# Altium PCB Mainboard.PcbDoc
Units mil, origin at the board's own origin, x right, y up, seen from the top; angles counter-clockwise.
Board outline 2233 x 1279 mil, 4 copper layers (Top Layer, GND, Power, Bottom Layer), stack 23.756 mil thick; 18 components, 15 nets, 70 pads, 11 vias.
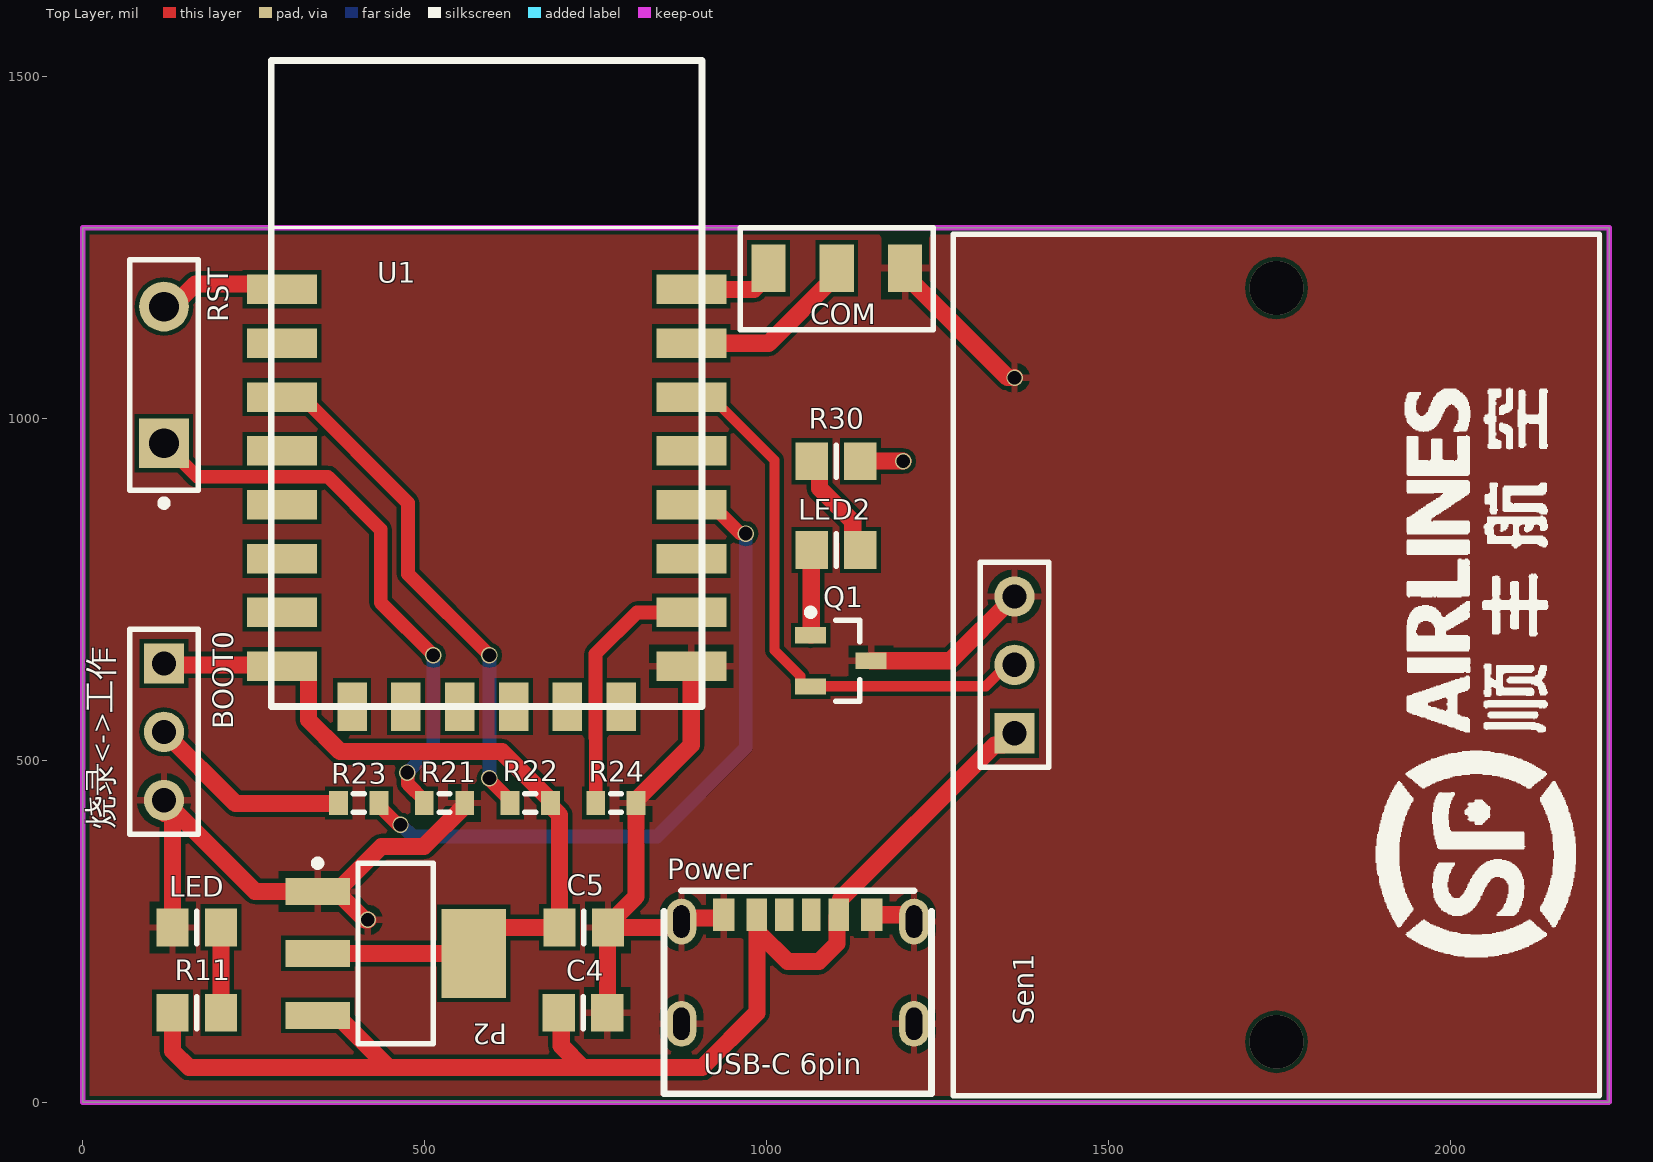
[diagram p0: Top Layer view]
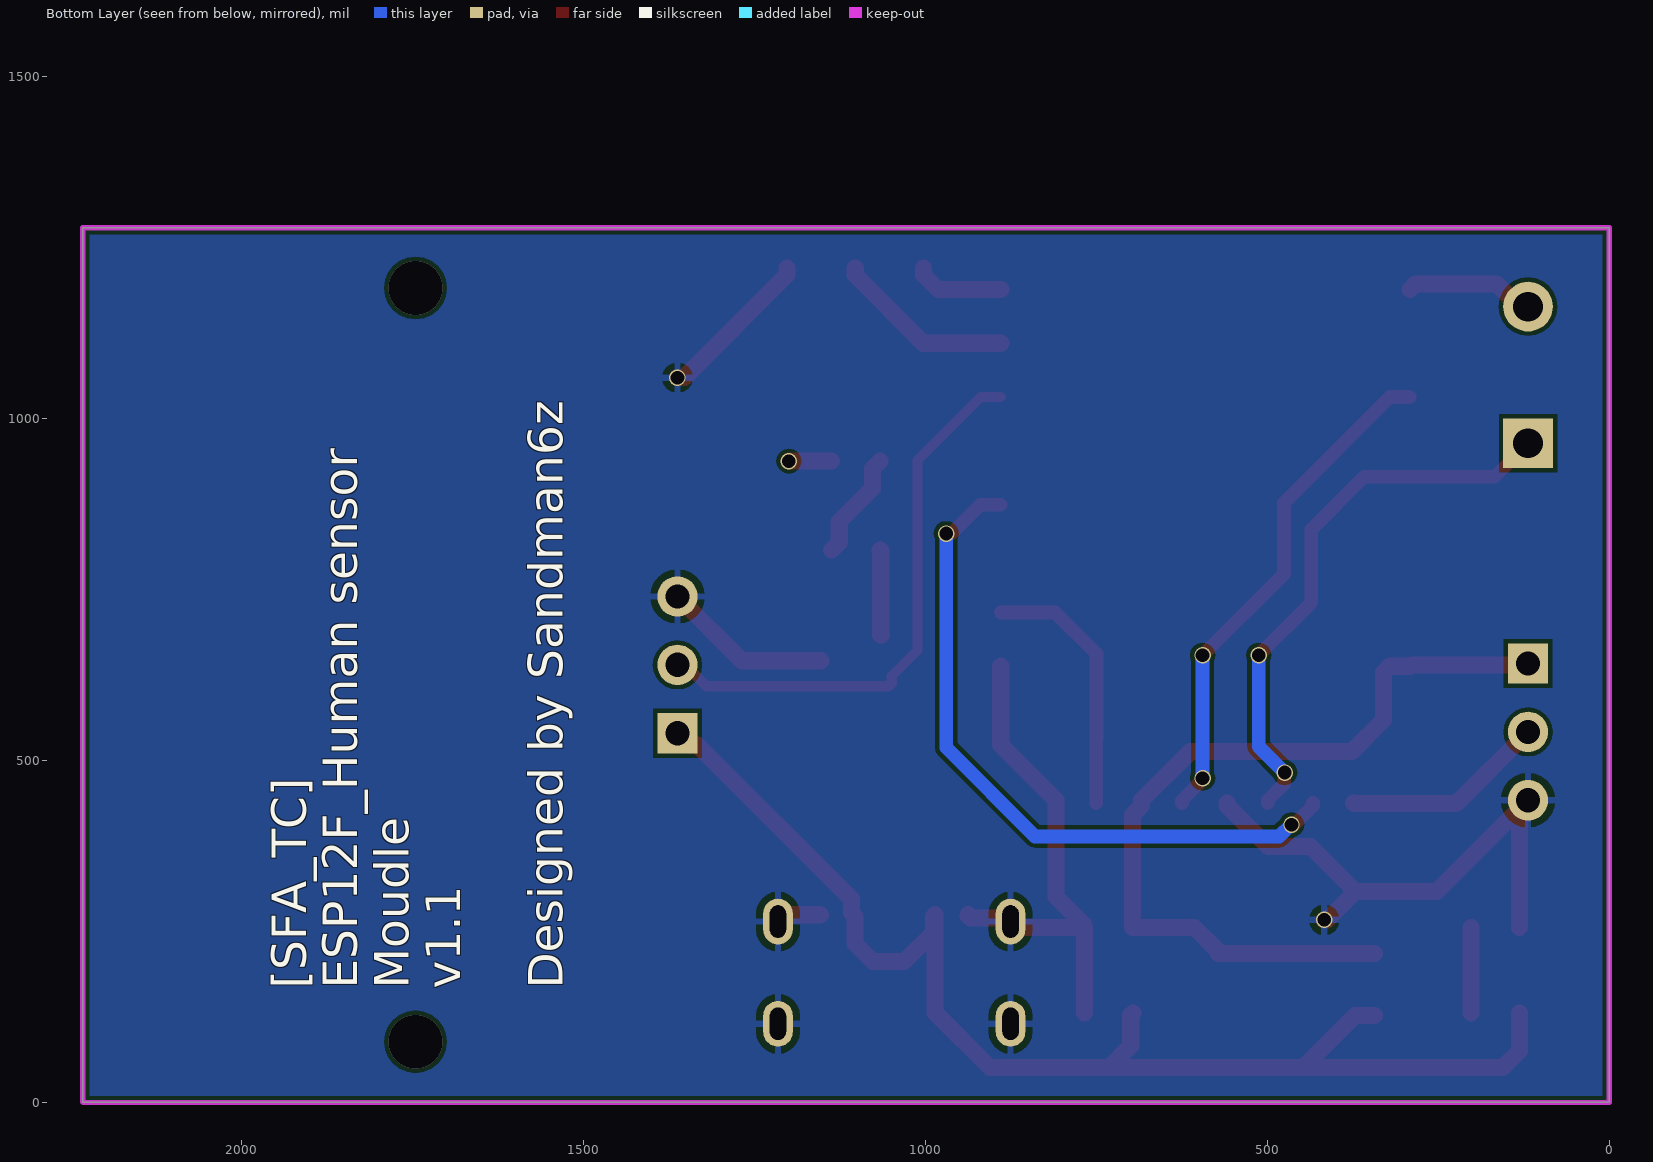
[diagram p1: Bottom Layer view, seen from below]
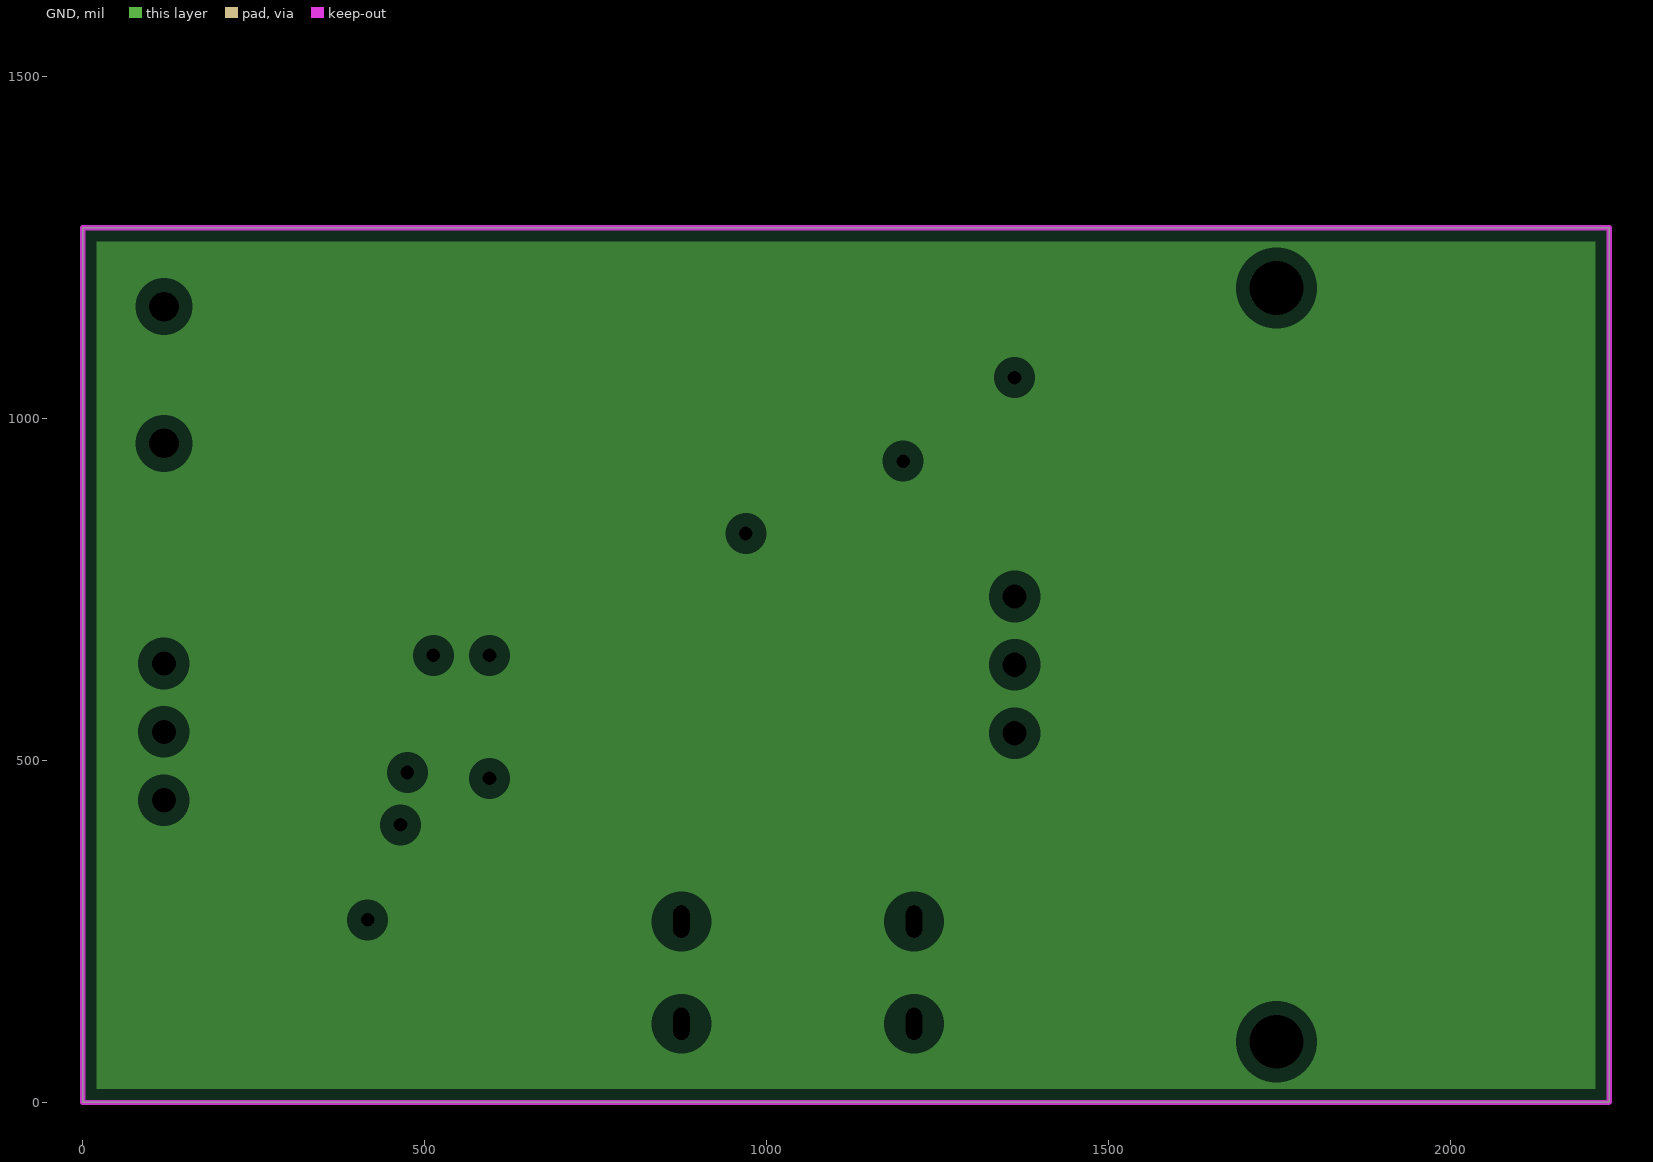
[diagram p2: GND, clearances drawn from the general rule]
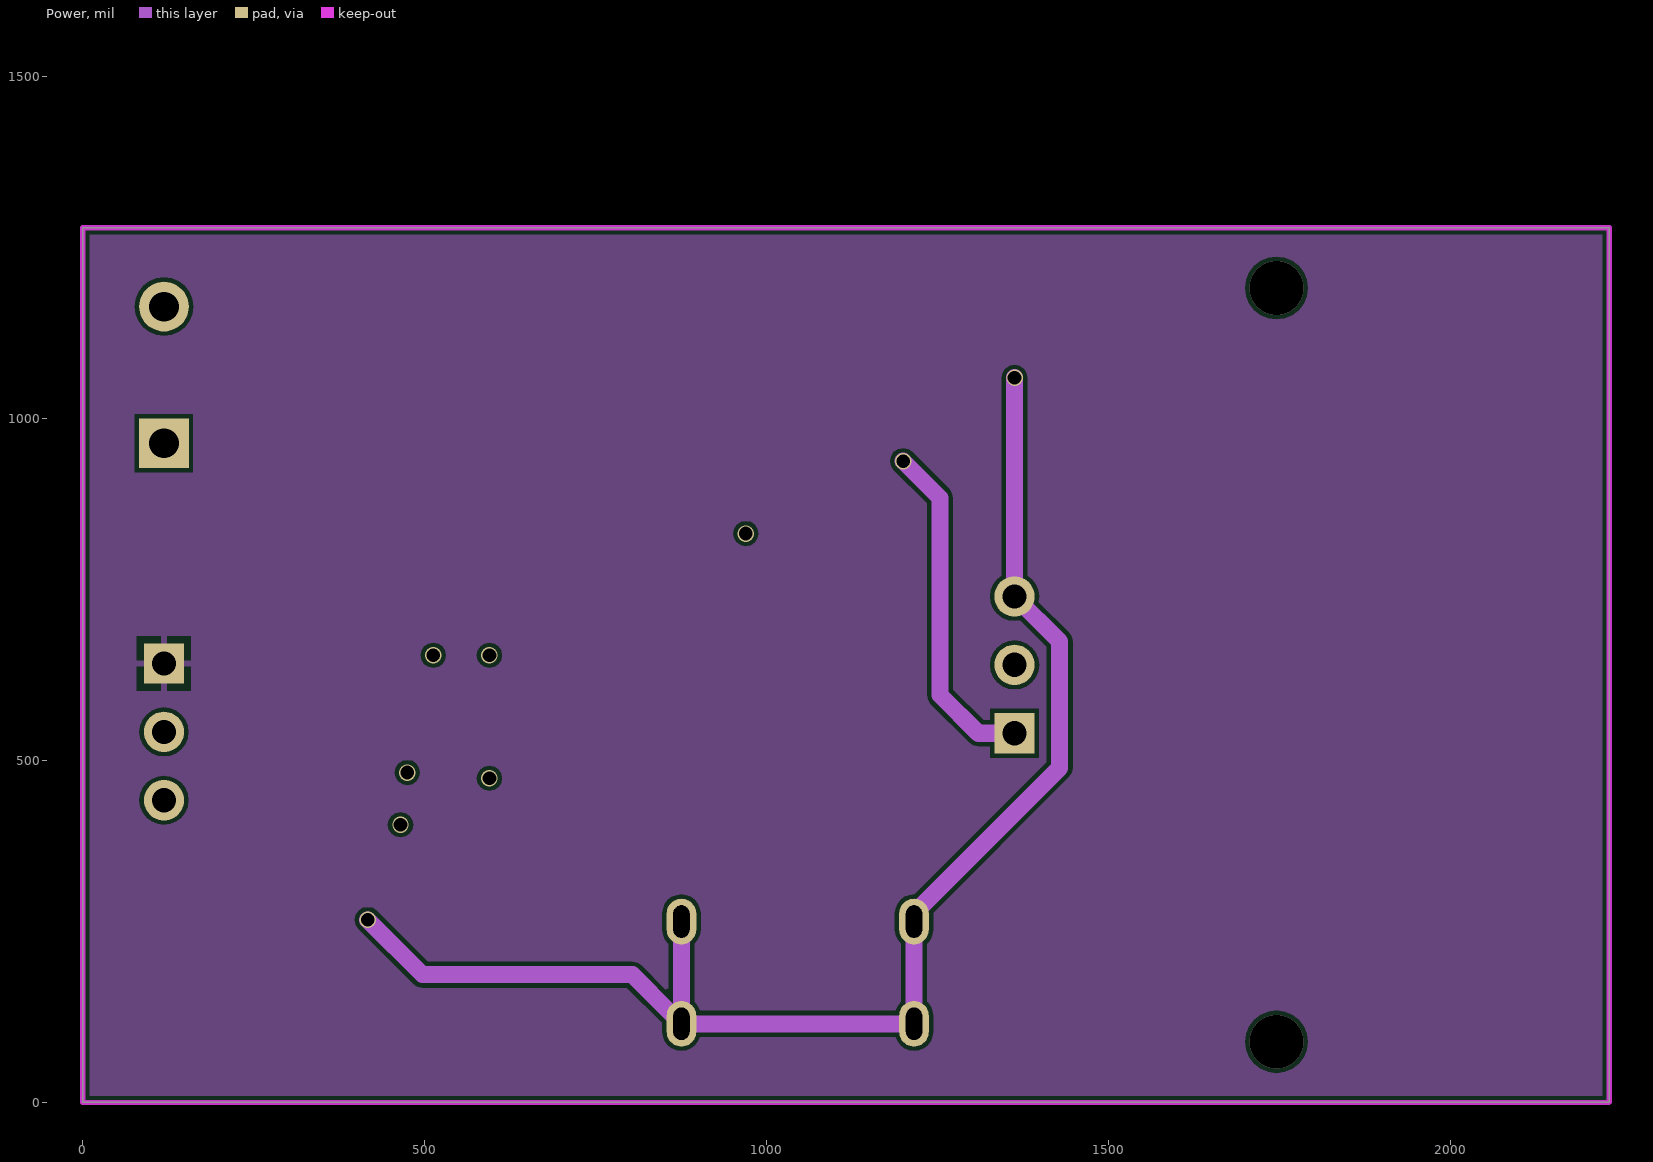
[diagram p3: Power]

## Layer stack, top to bottom
Top Solder: solder mask 0.4, Solder Resist, Dk 3.5
Top Layer: signal copper 1.4
Dielectric 1: prepreg 2.8, PP-006, Dk 4.1
GND: plane copper 1.378
Dielectric 2: dielectric 12.6, FR-4, Dk 4.8
Power: signal copper 1.378
Dielectric 3: prepreg 2.8, PP-006, Dk 4.1
Bottom Layer: signal copper 1.4
Bottom Solder: solder mask 0.4, Solder Resist, Dk 3.5

## Board outline
0,0 0,1279 2233,1279 2233,0

## Design rules (kind name [scope] priority, off if disabled: settings)
Clearance [All] p1: gap=6 ignorepadtopadclearanceinfootprint=FALSE
HoleToHoleClearance [All] p1: gap=6 allowstackedmicrovias=TRUE
MinimumSolderMaskSliver [All] p1: minsoldermaskwidth=3
PlaneClearance [All] p1: clearance=20
PlaneConnect [All] p1: planeconnectstyle=Relief reliefexpansion=20 reliefentries=4 reliefconductorwidth=10 reliefairgap=10
PolygonConnect [All] p1: connectstyle=Relief reliefconductorwidth=10 reliefentries=4 polygonreliefangle="90 Angle" airgapwidth=10
RoutingVias [All] p1: holewidth=16 width=24 viastyle="Through Hole" minholewidth=10 minwidth=20 maxholewidth=24 maxwidth=32
SilkToSilkClearance [All] p1: silktosilkclearance=0
SilkToSolderMaskClearance [IsPad] p1: minsilkscreentomaskgap=0 clearancetoexposedcopper=TRUE
SolderMaskExpansion [All] p1: expansion=4 istentingtop=FALSE
Width Width_GND [InNet('GND') And OnLayer('Top Layer')] p1: maxlimit=40 minlimit=10 preferedwidth=25 minimp=50.000000 maximp=50.000000 favimp=50.000000
Width Width_Power [InNet('3V3') And OnLayer('Top Layer')] p2: maxlimit=40 minlimit=10 preferedwidth=25 minimp=50.000000 maximp=50.000000 favimp=50.000000
Width [All] p3: maxlimit=25 minlimit=10 preferedwidth=20 minimp=50.000000 maximp=50.000000 favimp=50.000000
24 further rules are at their usual default settings.

## Classes and differential pairs
component class Power: 5->3V3 C4 C5 LED P2 Power R11
component class ESP12F: BOOT0 COM LED2 Q1 R21 R22 R23 R24 R30 RST Sen1 U1

## Components (designator, comment, footprint, x,y, rotation, side; value= is the part's Value field where it differs from the comment)
BOOT0 "模式选择" HDR1X3 119,642 r270 top
C4 "Cap" 6-0805_N 732,131 r180 top value=100pF
C5 "Cap" 6-0805_N 733,256 r180 top value=100pF
COM "UART_3pads" 3pads 1003,1220 r90 top
LED "LED3" 6-0805_N 167,256 r180 top
LED2 "LED3" 6-0805_N 1102,808 r180 top
P2 "LMS8117AMP-3.3" MP04A_N 458,218 r0 top
Power "USB-C" USB-C 875.84,264.61 r0 top
Q1 "QNPN" SOT-23B_N 1109,646 r0 top
R11 "Res3" 6-0805_N 167,131 r180 top value=1K
R21 "Res3" J1-0603 529.33,438 r180 top value=1K
R22 "Res3" J1-0603 654.67,438 r180 top value=1K
R23 "Res3" J1-0603 404,438 r180 top value=1K
R24 "Res3" J1-0603 780,438 r0 top value=1K
R30 "Res3" 6-0805_N 1102,938 r0 top value=1K
RST "SW-PB" SPST-2 119,1064 r90 top
Sen1 "HR-SR501" HR-SR501 2218.51,10.08 r90 top locked
U1 "ESP-12E&F Onboard Module" "ESP-12E&F Module" 591,884 r0 top locked

## Footprints (in the part's own frame and the unit in brackets; to place one, negate y for a bottom-side part, rotate by r counter-clockwise, add the part's x,y. Pads: shape width x height; smd on the part's side, far side on the other; paste and mask are expansions set on the pad)
3pads [mil]
  rect 70x50 smd: 1(0,0) 2(0,-100) 3(0,-200)
6-0805_N [mm] "Chip Resistor, Body 2.0x1.2mm, IPC Medium Density"
  rect 1.2x1.4 smd: 1(-0.9,0) 2(0.9,0)
  silkscreen extent 0,-0.6 0,0.6, body extent -1.07,-0.7 1.07,0.7, height 0.7
"ESP-12E&F Module" [mm]
  rect 2.6x1.1 smd: 1(-7.6,7.75) 2(-7.6,5.75) 3(-7.6,3.75) 4(-7.6,1.75) 5(-7.6,-0.25) 6(-7.6,-2.25) 7(-7.6,-4.25) 8(-7.6,-6.25) 15(7.6,-6.25) 16(7.6,-4.25) 17(7.6,-2.25) 18(7.6,-0.25) 19(7.6,1.75) 20(7.6,3.75) 21(7.6,5.75) 22(7.6,7.75)
  rect 1.1x1.8 smd: 9(-5,-7.75) 10(-3,-7.75) 11(-1,-7.75) 12(1,-7.75) 13(3,-7.75) 14(5,-7.75)
  silkscreen extent -8,-7.75 8,16.25, body extent -8.01,-7.75 8,16.26, height 2.65
HDR1X3 [mm] "Connector; Header; 3 Position"
  rect 1.5x1.5 hole 0.9: 1(0,0)
  round 1.5 hole 0.9: 2(2.54,0) 3(5.08,0)
  silkscreen extent -1.27,-1.27 6.35,1.27
HR-SR501 [mm] "人体红外感应模块"
  rect 1.5x1.5 hole 0.9: 1(13.46,21.73)
  round 1.5 hole 0.9: 2(16,21.73) 3(18.54,21.73)
  silkscreen extent 0,0 32,24, body extent 0,0 32,24, height 16.6
J1-0603 [mm] "Chip Resistor, Body 1.6x0.8mm, IPC High Density"
  rect 0.7x0.9 smd: 1(-0.75,0) 2(0.75,0)
  silkscreen extent -0.2,-0.35 0.2,0.35, body extent -0.85,-0.48 0.85,0.48, height 0.9
MP04A_N [mm] "SOT223, 4-Leads, Body 6.5x3.5mm, Pitch 2.3mm, Lead Span 7mm, IPC Medium Density"
  rect 2.4x1 smd: 1(-2.9,2.3) 2(-2.9,0) 3(-2.9,-2.3)
  rect 2.4x3.3 smd: 4(2.9,0)
  silkscreen extent -3.02,-3.35 1.4,3.47, body extent -1.86,-3.35 1.86,3.35, height 1.8
SOT-23B_N [mm] "SOT23, 3-Leads, Body 2.9x1.3mm, Pitch 0.95mm, Lead Span 2.4mm, IPC Medium Density"
  rect 1.15x0.6 smd: 1(-1.125,0.95) 2(-1.125,-0.95) 3(1.125,0)
  silkscreen extent -1.25,-1.5 0.7,1.92, body extent -0.7,-1.5 0.7,1.5, height 1.14
SPST-2 [mm] "Switch; 2 Leads"
  rect 1.85x1.85 hole 1.1: 1(-2.54,0)
  round 1.85 hole 1.1: 2(2.54,0)
  silkscreen extent -4.89,-1.27 4.28,1.27
USB-C [mm]
  rect 0.8x1.2 smd: 1(1.57,0.254) 6(7.07,0.254)
  rect 0.76x1.2 smd: 2(2.8,0.254) 5(5.84,0.254)
  rect 0.7x1.2 smd: 3(3.82,0.254) 4(4.82,0.254)
  oval 1.1x1.7 hole 1.2 slot 0.6 at 0 deg: 7(0,0) 8(0,-3.8) 9(8.64,0) 10(8.64,-3.8)
  silkscreen extent -0.65,-6.4 9.29,1.14, body extent -0.13,-6.62 8.81,1.28, height 3.19

## Part data
BOOT0: library part "Header 3", "Header, 3-Pin", LatestRevisionDate=17-Jul-2002, LatestRevisionNote="Re-released for DXP Platform.", Publisher="Altium Limited"
C4 C5: "Capacitor", LatestRevisionDate=17-Jul-2002, LatestRevisionNote="Re-released for DXP Platform.", PackageDescription="Radial Cap, Thru-Hole; 2 Leads; 0.3 in Pin Spacing", PackageReference=RAD-0.3, Published=8-Jun-2000, Publisher="Altium Limited"
LED LED2: "Typical BLUE SiC LED", DatasheetVersion=16-Apr-2002, LatestRevisionDate=17-Dec-2003, LatestRevisionNote="PCB Footprint replaced.", PackageDescription="SM LED; 2 C-Bend Leads; Body 3.5 x 2.8 x 1.9 mm, inc leads (LxWxH typ)", PackageReference=3.5X2.8X1.9, PackageVersion=16-Apr-2002, Published=8-Jun-2000, Publisher="Altium Limited"
P2: "1A Low-Dropout Linear Regulator, 4-pin SOT-223", Manufacturer="National Semiconductor", PackageTopMarking=XYTT*LS01, PowerWise=N, Code_IPC=SOT223-4, Code_JEDEC=TO-261-AA, ComponentLink1Description="Manufacturer URL", ComponentLink1URL=http://www.national.com/, ComponentLink2Description="LMS8117A Datasheet", ComponentLink2URL=http://www.national.com/ds/LM/LMS8117A.pdf, ComponentLink3Description="LMS8117A Web Page", ComponentLink3URL=http://www.national.com/pf/LM/LMS8117A.html, ComponentLink4Description="MP04A Package Page", ComponentLink4URL=http://www.national.com/packaging/folders/mp04a.html, CompType="LDO IC", DatasheetVersion=Apr-2005, High-Reliability=Y, PackageDescription="Molded SOT-223, 6.50 x 3.56 x 1.6mm Body, 4 Lead, 2.3mm Pitch", PackageReference=MP04A, PackageVersion="revB, Apr-2003", PartNumber=LMS8117AMP-3.3, PinCount=4, RoHS=N
Q1: "NPN Bipolar Transistor", LatestRevisionDate=29-May-2009, LatestRevisionNote="IPC-7351 Footprint Added.", PackageDescription="3-Pin SOT-23 Package 0.95 mm Pitch, 2.4 mm Lead Span", PackageReference=SOT-23B, PackageVersion=Aug-1999, Published=8-Jun-2000, Publisher="Altium Limited"
R11 R21 R22 R23 R24 R30: "Resistor", LatestRevisionDate=29-May-2009, LatestRevisionNote="IPC-7351 Footprint Added.", PackageDescription="Chip Resistor", PackageReference=J1-0603, Published=8-Jun-2000, Publisher="Altium Limited"
RST: "Switch", LatestRevisionDate=17-Jul-2002, LatestRevisionNote="Re-released for DXP Platform.", PackageDescription="Switch; 2 Leads", PackageReference=SPST-2, Published=24-Mar-1999, Publisher="Altium Limited"
Sen1: "人体红外感应模块"

## Via types
v1: diameter 24, hole 20, Top Layer to Bottom Layer, 9 vias
v2: diameter 78.74, hole 78.74, Top Layer to Bottom Layer, 2 vias

## Nets (pads, with @x,y where several pads share a name; then routed paths per layer and width w, separated by ;. In a path a pad name is that pad's centre, name@x,y a point inside that pad or via, vN(x,y) a via of type N, cw(c..) or ccw(c..) an arc to the next point about the centre after c; other vN are vias at no path point)
3V3: BOOT0.1 C5.2 P2.2 P2.4 R22.1 U1.8 | length 1251.6
  Top Layer w25: BOOT0.1 121.03,639.97 289.76,639.97 U1.8 321.32,637.94 330.47,628.78 330.47,559.31 376.78,513 613.13,513 684.19,441.94 R22.1 684.19,434.06 697.57,420.69 C5.2 606.92,256 572.17,221.26 P2.4 P2.2
GND: BOOT0.3 C4.1 C5.1 COM.3 LED.2 P2.1 Power.1 Power.6 Power.7 Power.8 Power.9 Power.10 Q1.3 R21.1 R24.2 Sen1.3 U1.15 | length 4169.3
  Top Layer w20: BOOT0.3 119,420.22 BOOT0.3@131.57,420.22
  Top Layer w25: BOOT0.3 252.45,308.55 P2.1 P2.1@371.39,308.55 ; LED.2 BOOT0.3@131.57,420.22 ; v1(417,267) 412.94,267 P2.1@371.39,308.55 ; R21.1 558.86,434.06 499.06,374.26 437.09,374.26 P2.1@371.39,308.55 ; C4.1 767.93,131.5 767.93,255.5 C5.1 ; U1.15 890.21,522.62 809.53,441.94 R24.2 809.53,301.03 768.43,259.94 C5.1 ; Power.1 937.65,272.85 934.41,269.61 880.84,269.61 Power.7 875.84,264.46 867.39,256 C5.1 ; Q1.3 1269,646 Sen1.3 ; Power.6 1207.54,274.61 1216,266.15 Power.9 ; COM.3 1203,1210 1353,1060 v1(1363,1060)
  Power w25: v1(417,267) 497,187 803.84,187 860.53,130.31 867.39,130.31 Power.8@875.84,121.86 ; Power.7 Power.8@875.84,121.86 ; v1(1363,1060) Sen1.3 1429,674 1429,489.42 Power.9@1218.58,279 ; Power.8@875.84,121.86 Power.8 Power.10 Power.9 Power.9@1216,279 ; Power.9@1216,279 Power.9@1218.58,279 ; Power.9@1216,279 Power.9@1218.58,279
GPIO0: BOOT0.2 R23.2 | length 299.4
  Top Layer w25: BOOT0.2 224,437 373.47,437 R23.2
NetLED2_1: LED2.1 R30.1 | length 159.4
  Top Layer w25: R30.1 1077.69,926.88 1077.69,898.31 1126.31,849.69 1126.31,819.12 LED2.1
NetLED2_2: LED2.2 Q1.1 | length 125.5
  Top Layer w25: Q1.1 1064.95,683.4 1065.64,684.09 1065.64,807.07 LED2.2
NetLED_1: LED.1 R11.1 | length 125
  Top Layer w25: R11.1 LED.1
NetR21_2: R21.2 RST.1 | length 828
  Top Layer w20: RST.1 167.76,915.24 358.76,915.24 435.88,838.12 435.88,731.12 v1(513,654) ; v1(475,482.5) 474.23,481.73 474.68,481.73 475.77,480.65 475.77,465.98 499.81,441.94 R21.2
  Bottom Layer w20: v1(475,482.5) 513,520.5 v1(513,654)
NetR22_2: R22.2 U1.3 | length 749
  Top Layer w20: U1.3 321.31,1031.64 476,876.95 476,773 v1(595,654) ; v1(595,474.08) 595,472.08 625.14,441.94 R22.2
  Bottom Layer w20: v1(595,474.08) v1(595,654)
NetR23_1: R23.1 U1.18 | length 1023.2
  Top Layer w20: R23.1 433.53,434.06 461.59,406 v1(465,406) ; U1.18 919.74,874.16 961.13,832.77 969.23,832.77 v1(970,832)
  Bottom Layer w20: v1(465,406) 466.08,406 483.08,389 840,389 970,519 v1(970,832)
NetR24_1: R24.1 U1.16 | length 383.4
  Top Layer w20: R24.1 750.47,533.19 750.2,533.47 750.2,656.2 810.68,716.68 U1.16
OUT: Q1.2 Sen1.2 U1.20 | length 830.3
  Top Layer w15: U1.20 919.74,1031.64 1012,939.38 1012,661.31 1049.57,623.74 1049.57,612.91 1053.88,608.6 Q1.2 1320.82,608.6 1352.23,640 Sen1.2
RST: RST.2 U1.1 | length 189.7
  Top Layer w25: RST.2 131.94,1164 164.94,1197 283.9,1197 U1.1
RXD: COM.2 U1.21 | length 264.1
  Top Layer w25: U1.21 1003.38,1110.38 1103,1210 COM.2
TXD: COM.1 U1.22 | length 131.4
  Top Layer w25: U1.22 982.12,1189.12 1003,1210 COM.1
VCC: C4.2 P2.3 Power.2 Power.5 R11.2 R30.2 Sen1.1 | length 2478.9
  Top Layer w25: R11.2 131.57,75.43 156,51 447.83,51 ; P2.3 371.39,127.45 447.83,51 ; C4.2 700,127.57 700,83 732,51 ; R30.2 v1(1200,938) ; Sen1.1 1345.97,522.97 1333.97,522.97 1108.22,297.22 1108.22,277.07 Power.5 1103.3,272.15 1103.3,232.3 1077,206 1031.28,206 988.54,248.74 988.54,272.15 Power.2 986.08,131.08 906,51 732,51 ; 447.83,51 732,51
  Power w25: v1(1200,938) 1254,884 1254,596 1310,540 Sen1.1
pads on no net: Power.3 Power.4 U1.2 U1.4 U1.5 U1.6 U1.7 U1.9 U1.10 U1.11 U1.12 U1.13 U1.14 U1.17 U1.19
copper on no net:
  other v2: 1746.07,88.82 1746.07,1191.18

## Polygon pours and split planes (outlines as drawn)
GND on Top Layer "GND_L01_P000" (solid, remove dead copper, pour order 0): 0,0 0,1279 2233,1279 2233,0
GND on Bottom Layer "GND_L04_P001" (solid, remove dead copper, pour order 1): 0,0 0,1279 2233,1279 2233,0
3V3 on Power "3V3_L03_P002" (solid, remove dead copper, pour order 2): 0,0 0,1279 2233,1279 2233,0
no net on GND (split plane): 2212.9,20.1 20.1,20.1 20.1,1258.9 2212.9,1258.9

## Keep-outs
Keep-Out Layer:
  lines w7.87: 0,0 2232,0 2233,1 2233,1279 0,1279 0,0

## Silkscreen, mask and mechanical layers (free items; w line width, h text height)
Top Overlay:
  drawing of 32 lines, arcs and shapes, not listed
  text "烧录<->工作" at 55.34,400.03 h60 r90
Bottom Overlay:
  text "[SFA_TC] / ESP12F_Human sensor  / Moudle / v1.1 /  / Designed by Sandman6z" at 1531,166 h50 r270
Mechanical 1:
  the board outline again, w7.87

## Dimensions
0,0 to 0,1279 on Mechanical 1
0,0 to 2233,0 on Mechanical 1

## Text inside footprints (layer, text, board x,y; h text height)
Power: Top Overlay "USB-C 6pin" at 908.39,41.6 h30